# Altium PCB BEE_BOARD.PcbDoc (part 2 of 2)
Units mm, origin at the board's own origin, x right, y up, seen from the top; angles counter-clockwise.
Board outline 146.54 x 65.01 mm, 8 copper layers (Top, GND_1, Signal_1, GND_2, PWR, Signal_2, GND_3, Bottom), stack 1.331 mm thick; 113 components, 76 nets, 368 pads, 14 vias.
Unrouted connection lines stored in the file: 262.
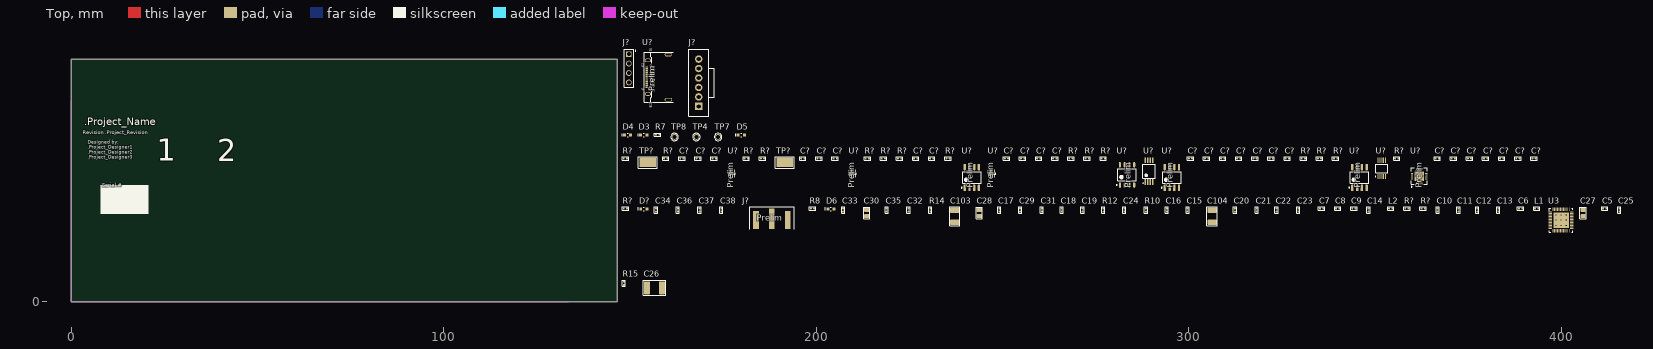
[diagram p0: Top view]

## Via types
v1: diameter 0.5, hole 0.3, Top to Bottom, 9 vias
v2: diameter 0.5, hole 0.2, Top to Bottom, 5 vias

## Nets (pads, with @x,y where several pads share a name; then routed paths per layer and width w, separated by ;. In a path a pad name is that pad's centre, name@x,y a point inside that pad or via, vN(x,y) a via of type N, cw(c..) or ccw(c..) an arc to the next point about the centre after c; other vN are vias at no path point) (continued)
GND: C5.1 C6.2 C7.1 C8.1 C9.1 C10.1 C11.1 C12.1 C13.1 C14.1 C17.1 C20.1 C21.1 C22.1 C23.1 C24.1 C25.1 C27.1 C28.1 C29.1 C30.1 C31.1 C32.1 C35.1 C36.1 C37.1 C38.1 C103.1 C104.1 C?.1@163.47,38.439 C?.1@167.813,38.439 C?.1@172.131,38.439 C?.1@195.931,38.439 C?.1@200.274,38.439 C?.1@204.592,38.439 C?.1@226.233,38.439 C?.1@230.551,38.439 C?.1@254.91,38.439 C?.1@259.253,38.439 C?.1@263.571,38.439 C?.1@299.969,38.439 C?.1@304.287,38.439 C?.1@308.631,38.439 C?.1@312.949,38.439 C?.1@317.292,38.439 C?.1@321.61,38.439 C?.1@325.928,38.439 C?.1@366.213,38.439 C?.1@370.531,38.439 C?.1@374.849,38.439 C?.1@379.192,38.439 C?.1@383.51,38.439 C?.1@387.853,38.439 C?.1@392.171,38.439 C?.2@251.481,38.439 D3.K D4.K D6.K D?.K J?.1@168.436,52.409 J?.2@149.69,63.905 J?.3@192.33,21.915 J?.4@183.81,21.915 J?.5@192.33,21.915 J?.6 R7.2 R14.1 R?.1@159.152,38.439 R?.1@180.767,38.439 R?.1@272.233,38.439 R?.2@214.143,38.439 U3.22 U3.23 U3.32 U3.43 U3.46 U3.49 U?.1@154.803,55.757 U?.2@154.803,64.757 U?.2@361.556,31.789 U?.3@160.303,54.182 U?.3@178.003,33.66 U?.3@210.464,33.66 U?.3@247.802,33.66 U?.4@160.303,66.332 U?.4@290.264,32.11 U?.4@297.341,30.533 U?.5@243.645,36.133 U?.5@285.301,36.744 U?.5@347.683,36.133 U?.5@352.773,33.597 U?.5@363.706,32.939 U?.9@351.273,37.997 U?.17 U?.A1 U?.A12 U?.B1 U?.B12
  other v1: 398.48,20.478 399.88,20.478 401.28,20.478 398.48,21.876 399.88,21.878 401.28,21.878 398.48,23.278 399.88,23.278 401.28,23.278
  other v2: 361.806,32.689 360.806,33.689 361.806,33.689 362.806,33.689 361.806,34.689
GPIO5: J?.3@149.69,61.365 R?.2@363.292,25.002 U3.33
GPIO6: J?.4@149.69,58.835 R?.2@358.948,25.002 U3.30
LED_RX: R?.2@149.195,25.002 U3.36
LED_TX: R8.2 U3.35
NetC6_1: C6.1 U3.28
NetC7_2: C7.2 C14.2 U3.20 U3.44
NetC8_2: C8.2 U3.31
NetC9_2: C9.2 U3.42
NetC15_2: C15.2 R10.2
NetC16_1: C16.1 R10.1 U3.8
NetC18_2: C18.2 R12.2 U3.12
NetC19_2: C19.2 R12.1
NetC32_2: C32.2 U3.4
NetC33_1: C33.1
NetC34_1: C34.1
NetD3_A: D3.A
NetD4_A: D4.A
NetD5_A: D5.A
NetD5_K: D5.K
NetD6_A: D6.A R8.1
NetD?_A: D?.A R?.1@148.306,25.002
NetJ?_1: J?.1@188.07,22.265
NetR14_2: R14.2 U3.5
NetR?_1: R?.1@217.572,38.439 U?.3@242.375,30.533
NetR?_2: R?.2@273.122,38.439 U?.3@296.071,30.533
NetU1_3: 
NetU2_1: 
NetU?_1: U?.1@288.314,32.11 U?.7@282.761,36.744
NetU?_3: U?.7@241.105,36.133
NetU?_4: U?.4@352.273,33.597 U?.7@345.143,36.133
NetU?_6: U?.6@346.413,36.133 U?.6@352.773,37.997
PE: J?.2@183.81,21.915 U?.15
RF_N: C34.2 U3.17
RF_P: C33.2 U3.16
SEL0: TP?.1@154.77,37.372 U?.1@350.773,33.597 U?.7@363.706,33.939
SEL1: TP?.1@191.55,37.372 U?.8@363.706,34.439
SPI_CLK_N: R?.2@339.822,38.439 U?.1@343.873,30.533 U?.B10
SPI_CLK_P: R?.1@338.933,38.439 U?.2@345.143,30.533 U?.B11
SPI_MISO_N: U?.8@293.531,36.133 U?.A7 U?.B7
SPI_MISO_P: U?.7@294.801,36.133 U?.A6 U?.B6
SPI_MOSI_N: R?.1@330.272,38.439 U?.4@347.683,30.533 U?.A10
SPI_MOSI_P: R?.2@331.161,38.439 U?.3@346.413,30.533 U?.A11
SPI_nCS: U?.2@247.303,33.66 U?.B8
SPICLK: J?.5@168.436,62.569 U3.41 U?.2@351.273,33.597 U?.7@352.273,37.997
SPIMISO: J?.4@168.436,60.029 U3.40 U?.2@294.801,30.533
SPIMOSI: J?.3@168.436,57.489 U3.39 U?.3@351.773,33.597 U?.8@351.773,37.997
SPInCS: J?.2@168.436,54.949 U3.24 U?.4@247.802,35.14
SYNC: U3.29 U?.4@362.556,31.789
SYNC_BB_LVDS_N: R?.2@235.784,38.439 U?.1@239.835,30.533 U?.9@362.556,35.589
SYNC_BB_LVDS_P: R?.1@234.895,38.439 U?.2@241.105,30.533 U?.10@362.056,35.589
SYNC_N: R?.1@334.59,38.439 U?.B3
SYNC_P: R?.2@335.479,38.439 U?.3@362.056,31.789 U?.B2
VDDCLK: C15.1 C16.2 C29.2 U3.9
VDDIF: C37.2 U3.7
VDDMS: C36.2 U3.6
VDDPA1: C10.2 C11.2 C12.2 C13.2 L1.2 U3.18
VDDPA2: C20.2 C21.2 C22.2 C23.2 L2.2 U3.19
VDDSYN: C38.2 U3.10
VDDVCO: C18.1 C19.1 C31.2 U3.11
pads on no net: C26.1 C26.2 R15.1 R15.2 R?.1@148.306,38.439 R?.1@185.111,38.439 R?.1@213.254,38.439 R?.1@221.89,38.439 R?.1@267.889,38.439 U3.1 U3.2 U3.13 U3.14 U3.34 U3.37 U3.38 U?.0 U?.1@177.003,33.66 U?.1@209.465,33.66 U?.1@246.803,33.66 U?.1@281.491,31.294 U?.2@288.964,32.11 U?.4@243.645,30.533 U?.4@285.301,31.294 U?.5@290.264,37.91 U?.5@297.341,36.133 U?.6@242.375,36.133 U?.6@284.031,36.744 U?.6@296.071,36.133 U?.7@288.964,37.91

## Polygon pours and split planes (outlines as drawn)
no net on GND_1 (split plane): 146.031,0.51 0.51,0.51 0.51,64.49 146.031,64.501
no net on GND_2 (split plane): 146.031,0.51 0.51,0.51 0.51,64.49 146.031,64.501
no net on PWR (split plane): 146.031,0.51 0.51,0.51 0.51,64.49 146.031,64.501
no net on GND_3 (split plane): 146.031,0.51 0.51,0.51 0.51,64.49 146.031,64.501

## Keep-outs
Keep-Out Layer:
  lines w0.254: 0.059,53.859 0.059,0.011 133.409,0.011

## Silkscreen, mask and mechanical layers (free items; w line width, h text height)
Top Overlay:
  rectangle: 7.845,23.573 20.763,31.276
  text ".Project_Name" at 3.478,47.29 h2
  text "Revision .Project_Revision" at 3.148,44.98 h1.02
  text "Designed by: / .Project_Designer1 / .Project_Designer2 / .Project_Designer3" at 4.502,38.297 h0.91
  text "1" at 22.975,35.767 h10
  text "2" at 39.188,35.721 h10
  text "Serial #" at 8.407,30.886 h1
Board Outline:
  the board outline again, w0.254

## Text inside footprints (layer, text, board x,y; h text height)
J?: Top Overlay "Prelim" at 184.064,21.735 h1.52; Board Outline "Board edge / 62 mils PCB" at 179.833,14.423 h1.52
U?: Top Overlay "Prelim" at 156.599,56.432 h1.52 r90; Top Overlay "A1" at 153.626,56.659 h0.51 r90; Top Overlay "A12" at 153.626,62.759 h0.51 r90; Top Overlay "B12" at 155.826,52.028 h0.51 r90; Top Overlay "B1" at 155.84,67.143 h0.51 r90; Board Outline "Board edge" at 163.434,53.097 h1.52 r90; Bottom Overlay "B1" at 155.046,63.628 h0.51 r90; Bottom Overlay "B12" at 155.046,57.528 h0.51 r90
U?: Top Overlay "Prelim" at 362.552,30.587 h1.52 r90
U?: Top Overlay "Prelim" at 346.024,30.587 h1.52 r90
U?: Top Overlay "Prelim" at 295.681,30.587 h1.52 r90
U?: Top Overlay "Prelim" at 284.419,30.573 h1.52 r90
U?: Top Overlay "Prelim" at 247.548,30.576 h1.52 r90
U?: Top Overlay "Prelim" at 241.986,30.587 h1.52 r90
U?: Top Overlay "Prelim" at 210.21,30.576 h1.52 r90
U?: Top Overlay "Prelim" at 177.749,30.576 h1.52 r90